# Altium PCB Car Power Supply v2 compact.PcbDoc
Units mm, origin at the board's own origin, x right, y up, seen from the top; angles counter-clockwise.
Board outline 152.4 x 101.6 mm, 2 copper layers (Top Layer, Bottom Layer); 27 components, 15 nets, 63 pads, 2 vias.
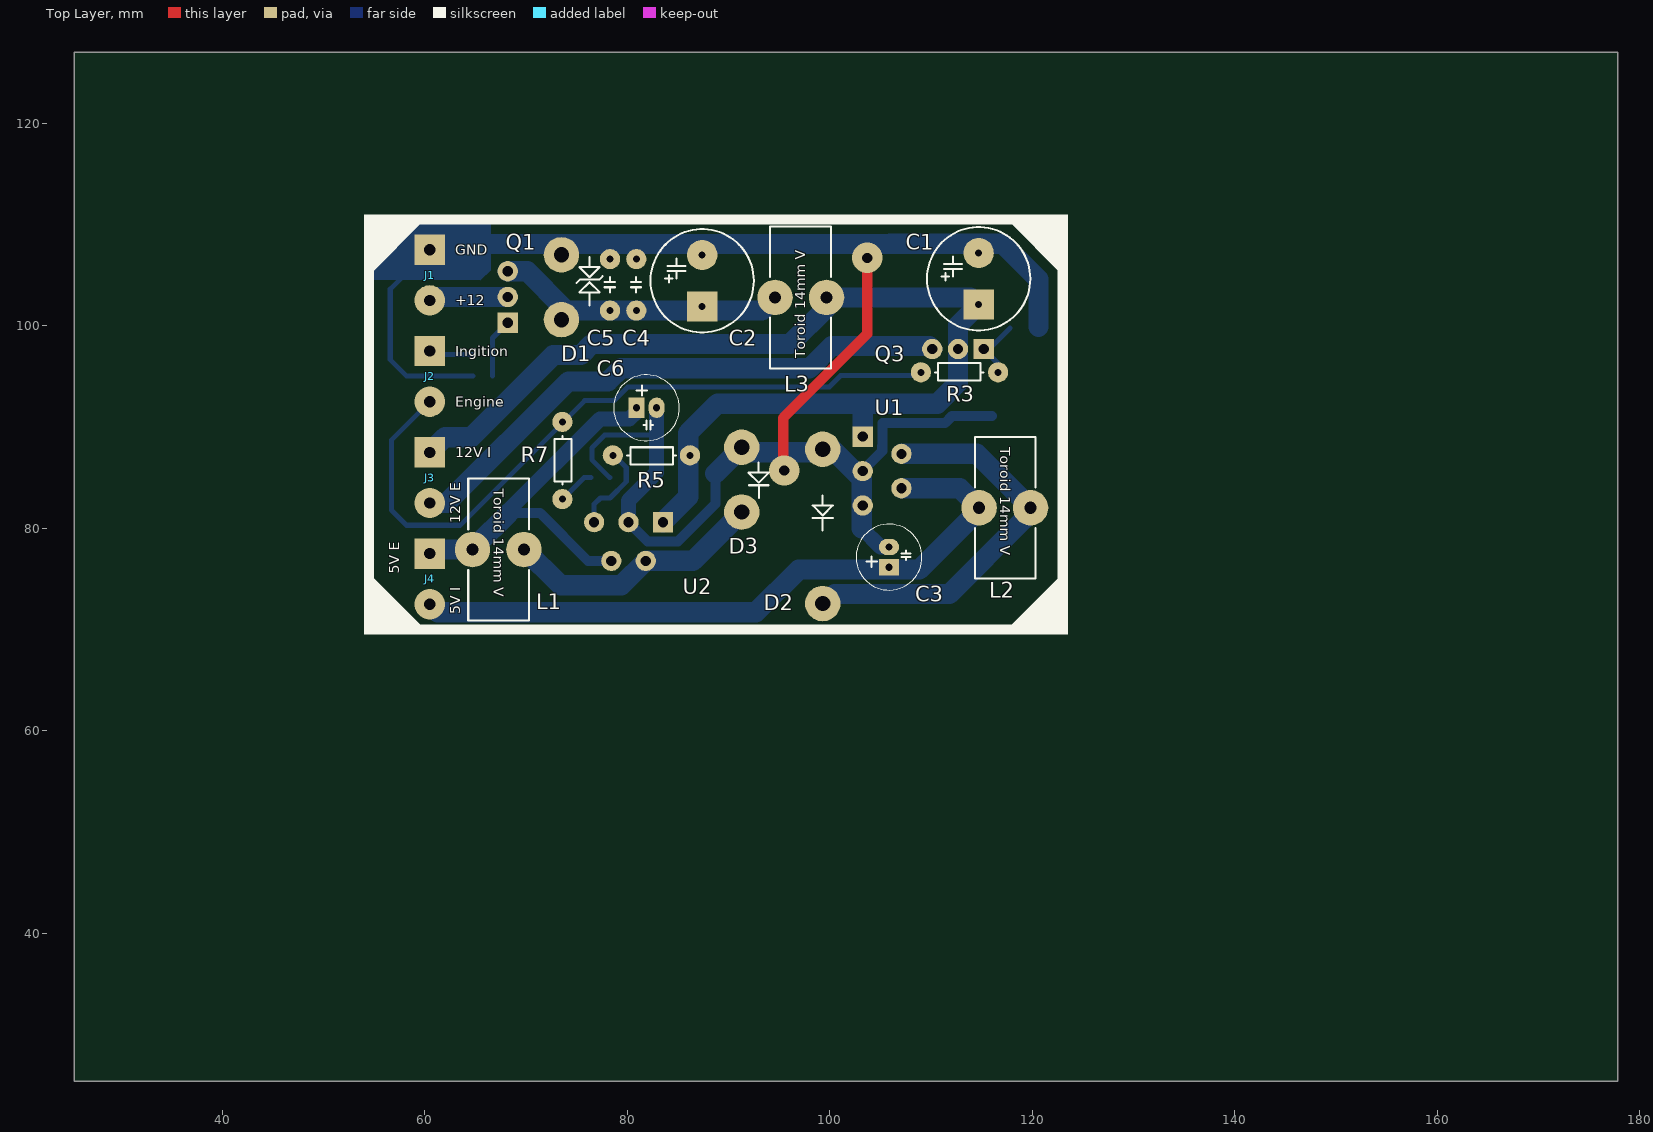
[diagram p0: Top Layer view]
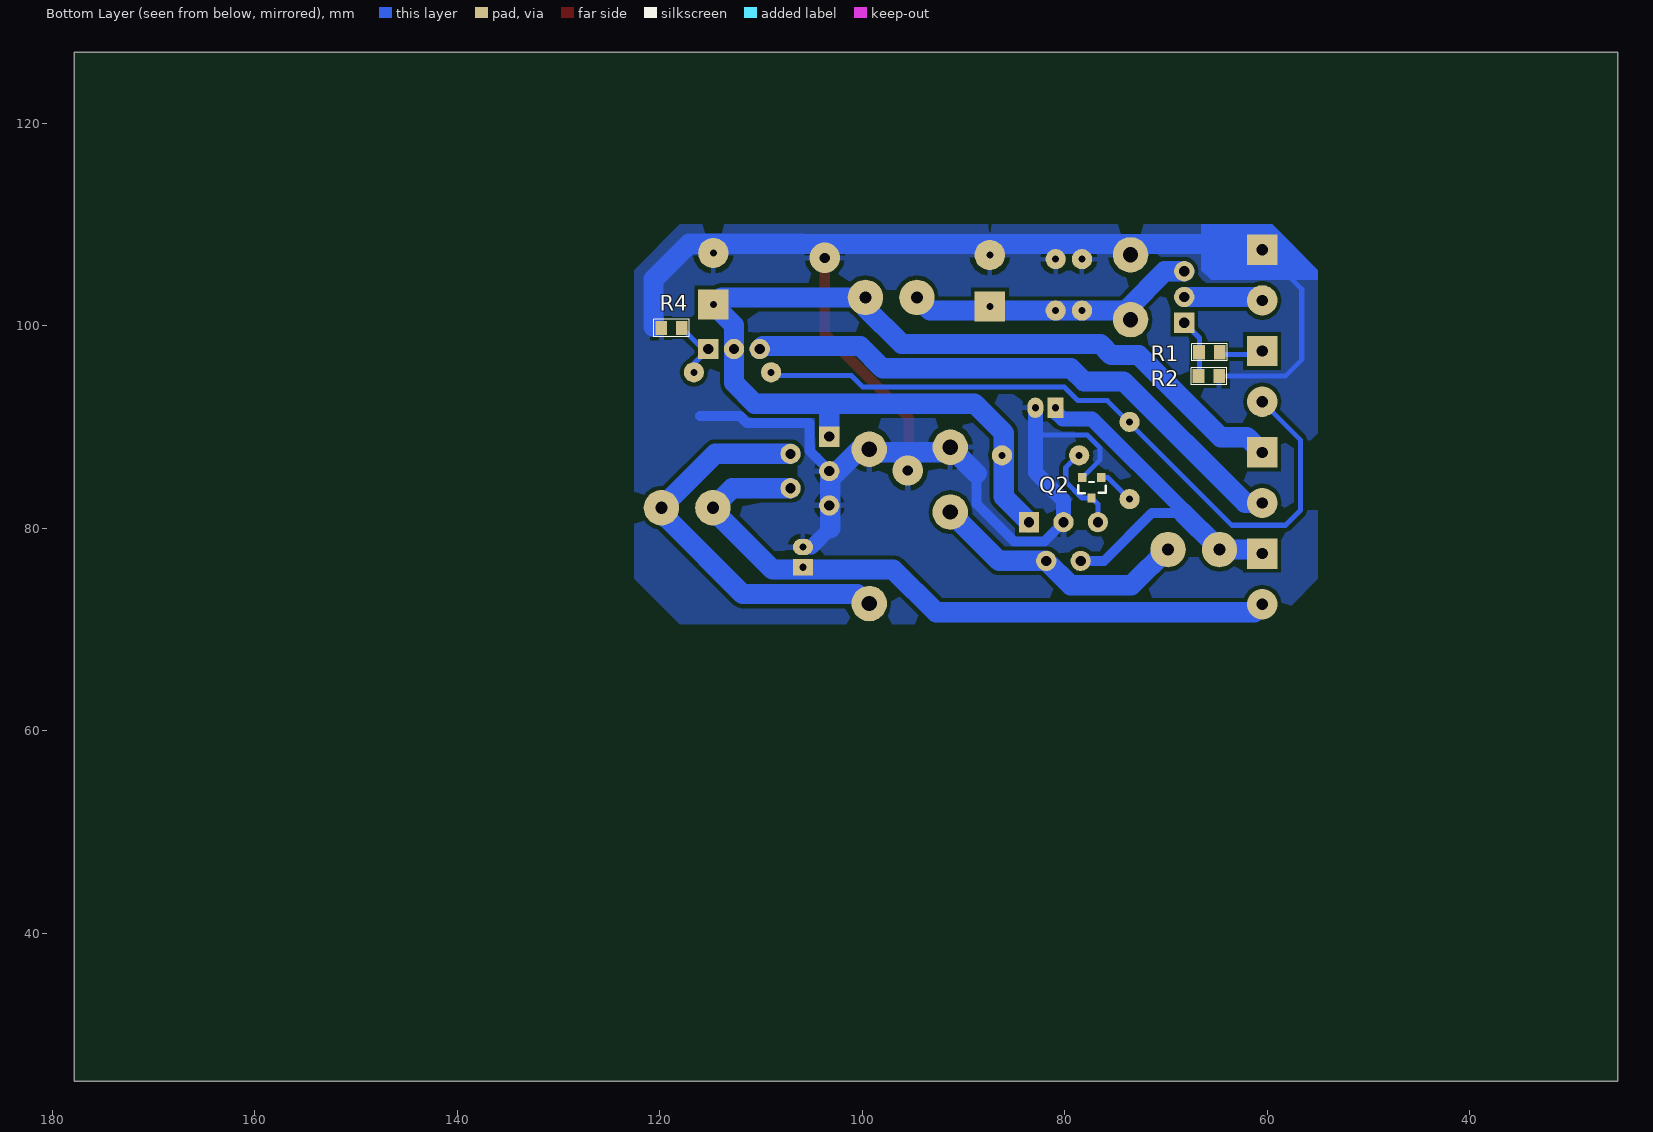
[diagram p1: Bottom Layer view, seen from below]
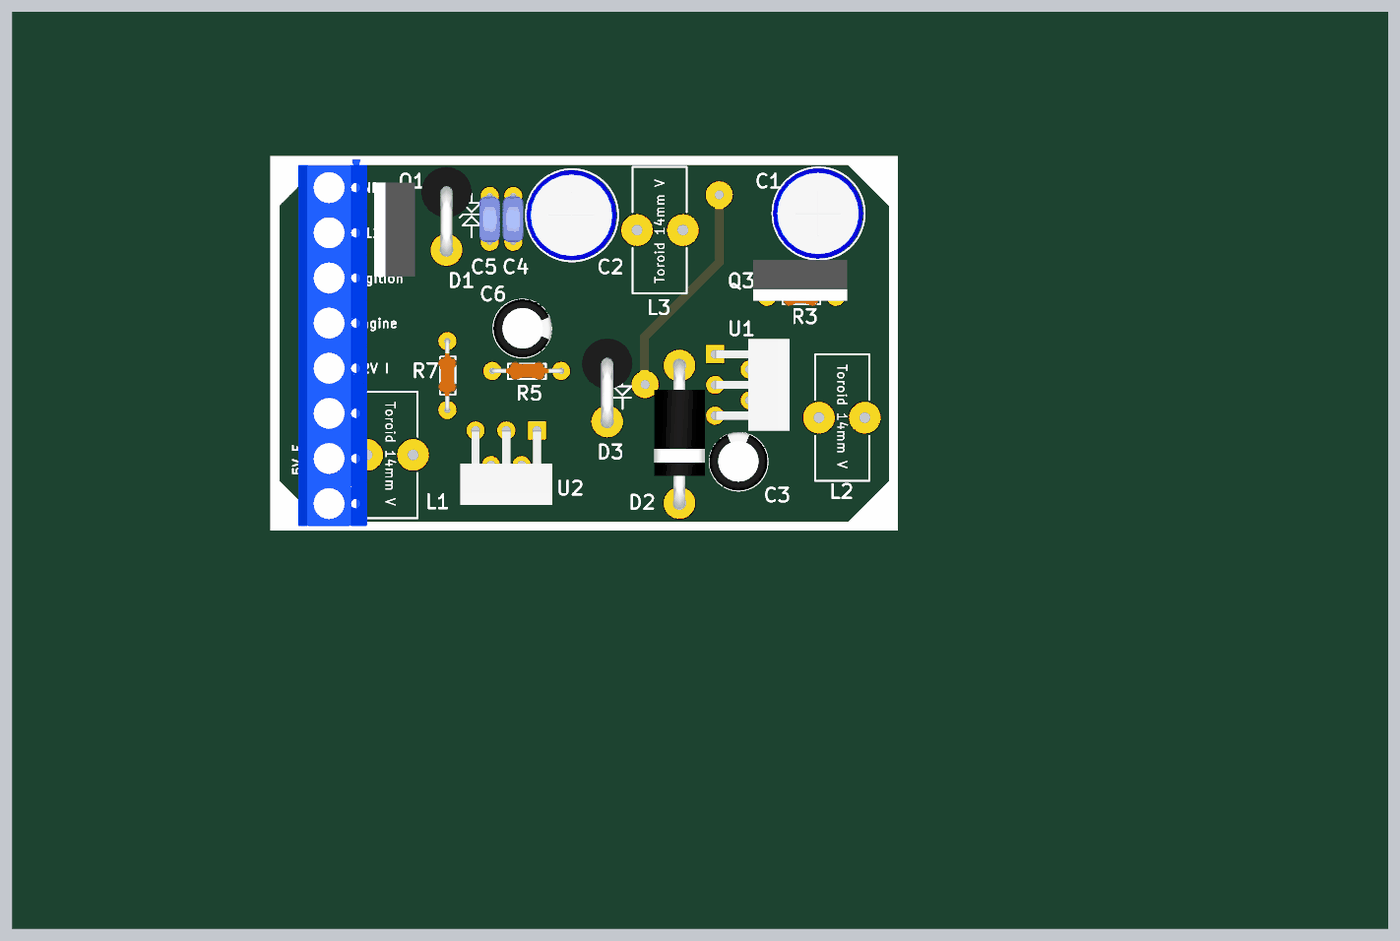
[diagram p2: 3D render of the assembled board from above, using the file's embedded part models]
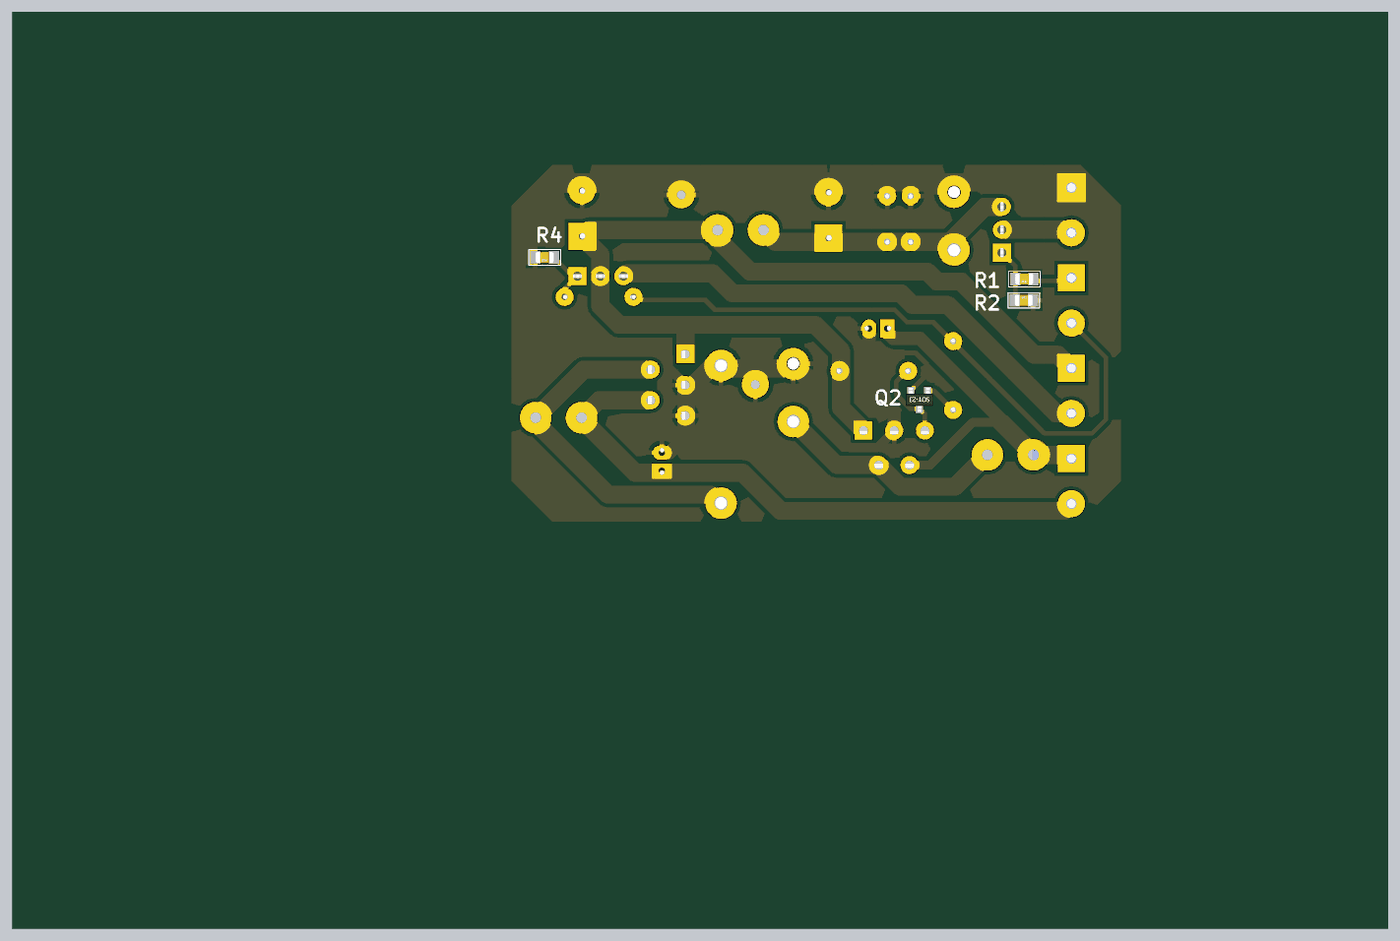
[diagram p3: 3D render of the assembled board from below, using the file's embedded part models]

## Layer stack, top to bottom
Top Solder: solder mask 0.0102, Solder Resist, Dk 3.5
Top Layer: signal copper 0.0356
Dielectric 1: dielectric 0.32, FR-4, Dk 4.8
Bottom Layer: signal copper 0.0356
Bottom Solder: solder mask 0.0102, Solder Resist, Dk 3.5

## Board outline
25.4,25.4 177.8,25.4 177.8,127 25.4,127

## Design rules (kind name [scope] priority, off if disabled: settings)
Clearance [All] p1: gap=0.4
ComponentClearance [All] p1: gap=0 collisioncheckmode=3 verticalgap=0 showdistances=FALSE
PlaneConnect [All] p1: planeconnectstyle=Relief reliefexpansion=0.508 reliefentries=4 reliefconductorwidth=0.4 reliefairgap=0.5
PolygonConnect [All] p1: connectstyle=Relief reliefconductorwidth=0.5 reliefentries=4 polygonreliefangle="90 Angle" airgapwidth=0.5
RoutingVias [All] p1: holewidth=0.711 width=1.27 viastyle="Through Hole" minholewidth=0.711 minwidth=1.27 maxholewidth=0.711 maxwidth=1.27
SolderMaskExpansion [All] p1: expansion=0.102
Width [All] p1: maxlimit=2 minlimit=0.2 preferedwidth=1
27 further rules are at their usual default settings.

## Components (designator, comment, footprint, x,y, rotation, side; value= is the part's Value field where it differs from the comment)
C1 "1000uF" "Cap E p5.08mm D10.2mm (3p)" 114.7,102.1 r90 top
C2 "1000uF" "Cap E p5.08mm D10.2mm (3p)" 87.4,101.9 r90 top
C3 "220uF 16V" "Cap E p2mm D6.5xH11" 105.85,76.15 r90 top
C4 "100n" "Cap P5.08MM (3p) disk2" 80.9,101.5 r90 top
C5 "10n" "Cap P5.08MM (3p) disk2" 78.3,101.5 r90 top
C6 "220uF 16V" "Cap E p2mm D6.5xH11" 80.9,91.9 r0 top
D1 "1.5KE20CA" "TVS diode DO-201 V" 73.5,107 r270 top
D2 "1N5822" "Diode DO-201" 99.3,87.8 r270 top
D3 "1N5822" "Diode DO-201 V" 91.3,88 r270 top
J1 "Connector" "DG301 5mm 2p" 60.5,107.5 r270 top
J2 "Connector" "DG301 5mm 2p" 60.5,97.5 r270 top
J3 "Connector" "DG301 5mm 2p" 60.5,87.5 r270 top
J4 "Connector" "DG301 5mm 2p" 60.5,77.5 r270 top
L1 "Inductor V" "Toroid V D14-W6" 69.8,77.9 r180 top
L2 "Inductor V" "Toroid V D14-W6" 119.825,82.025 r180 top
L3 "Inductor V" "Toroid V D14-W6" 94.6,102.8 r0 top
Q1 "TIP122" TO220-2 68.2,100.3 r0 top
Q2 "BC817-40" SOT-23 76.4,85 r0 bottom
Q3 "TIP122" TO220-2 115.2,97.7 r90 top
R1 "10k" "SMD 0805 (2012)" 66.8,95 r180 bottom
R2 "1kOm" "SMD 0805 (2012)" 64.7,97.4 r0 bottom
R3 "1 kOm" "Res p7.62 (4p) 0.25w" 109,95.4 r0 top
R4 "10 kOm" "SMD 0805 (2012)" 117.8,99.8 r0 bottom
R5 "10 kOm" "Res p7.62 (4p) 0.25w" 86.2,87.2 r180 top
R7 "1 kOm" "Res p7.62 (4p) 0.25w" 73.6,90.5 r270 top
U1 "LM2596T-5.0" "TO220-5 Vertical" 103.25,89.05 r180 top
U2 "LM2596T-5.0" "TO220-5 Vertical" 83.525,80.6 r90 top

## Footprints (in the part's own frame and the unit in brackets; to place one, negate y for a bottom-side part, rotate by r counter-clockwise, add the part's x,y. Pads: shape width x height; smd on the part's side, far side on the other; paste and mask are expansions set on the pad)
"Cap E p2mm D6.5xH11" [mm] "D 6.5mm; H 11mm"
  rect 1.6x2 hole 0.7: 1(0,0)
  oval 1.6x2 hole 0.7: 2(2,0)
  silkscreen extent -2.25,-3.25 4.25,3.25, body extent -2.22,-3.22 4.27,3.28, height 11.49
"Cap E p5.08mm D10.2mm (3p)" [mm] "D 10.2mm; H 17.5mm, Hole: 0.7mm"
  rect 3x3 hole 0.7: 1(0,0)
  round 3 hole 0.7: 2(5.08,0)
  silkscreen extent -2.56,-5.1 7.64,5.1, body extent -2.49,-4.97 7.57,5.08, height 16.53
"Cap P5.08MM (3p) disk2" [mm]
  round 2 hole 0.7: 1(0,0) 2(5.08,0)
  silkscreen extent 1.8,-0.48 3.3,0.53, body extent -0.29,-1.12 5.29,1.16, height 6.04
"DG301 5mm 2p" [mm]
  rect 3x3 hole 1.1: 1(0,0)
  round 3 hole 1.1: 2(5,0)
  body extent -3.1,-3.4 7.5,4.2, height 10
"Diode DO-201" [mm] "p6"
  round 3.5 hole 1.5: A(0,0) K(15.24,0)
  silkscreen extent 4.54,-1 8.04,1, body extent -0.66,-2.8 15.9,2.8, height 7.6
"Diode DO-201 V" [mm] "6p, p15.24mm"
  round 3.5 hole 1.5: A(0,0) K(6.4,0)
  silkscreen extent 1.5,0.67 5,2.67, body extent -2.8,-2.8 7.09,2.8, height 15.69
"Res p7.62 (4p) 0.25w" [mm] "L p7.62; horisontal"
  round 2 hole 0.7: 1(0,0) 2(7.62,0)
  silkscreen extent 1.4,-0.8 6.2,0.9, body extent -0.3,-1 7.8,1, height 2.1
"SMD 0805 (2012)" [mil]
  rect 45x55 smd: 1(0.35,0.98) 2(80.35,0.98)
  silkscreen extent -29,-32 109,34, body extent 1,-24 80,26, height 31
SOT-23 [mm]
  rect 0.8x0.9 smd: 1(0,0) 2(1.875,0) 3(0.95,2)
  silkscreen extent -0.45,0.45 2.27,1.53, body extent -0.57,-0.32 2.43,2.32, height 1.08
TO220-2 [mm]
  rect 2x2 hole 1: 1(0,0)
  round 2 hole 1: 2(0,2.54) 3(0,5.08)
  body extent -2.7,-2.65 1.8,7.75, height 19
"TO220-5 Vertical" [mm]
  rect 2x2 hole 1: 1(0,0)
  round 2 hole 1: 2(-3.825,1.7) 3(0,3.4) 4(-3.825,5.1) 5(0,6.8)
  body extent -8.24,-1.68 0,8.48, height 22.35
"Toroid V D14-W6" [mm] "10mm Black ring TEC.ORG"
  round 3.5 hole 1.2: 1(0,0) 2(5.08,0)
  silkscreen extent -0.5,-7 5.5,7
"TVS diode DO-201 V" [mm] "6p, p15.24mm"
  round 3.5 hole 1.5: 1(0,0) 2(6.4,0)
  silkscreen extent 0.2,1.47 5,4.07, body extent -2.8,-2.8 7.09,2.8, height 15.69

## Part data
C1 C2: library part "Cap E 1000mF x 25V", "Capacitor"
C3 C6: library part "Cap E 220mF x 16V", "Capacitor"
C4 C5: library part "Cap Ceramic", "Capacitor"
D1: library part "TVS 1.5KE20CA", "1500W Transil (TVS Diode)"
D2 D3: library part "D Shotki 1N5822", "3 Amp Shotki  Diode"
J1 J2 J3 J4: library part DG301-5.0-2P12, "DG301 series"
L1 L2 L3: "Inductor Vertical"
Q1 Q3: "NPN Darlington 5A, 65W, 100V, h>1000"
Q2: "NPN 45 V, 500 mA NPN general-purpose transistor"
R1 R2 R4: library part "Res SMD 0805"
R3 R5 R7: library part "Res All Types"
U1 U2: "Voltage Regulator"

## Via types
v1: diameter 3, hole 1, Top Layer to Bottom Layer, 2 vias

## Nets (pads, with @x,y where several pads share a name; then routed paths per layer and width w, separated by ;. In a path a pad name is that pad's centre, name@x,y a point inside that pad or via, vN(x,y) a via of type N, cw(c..) or ccw(c..) an arc to the next point about the centre after c; other vN are vias at no path point)
"+5V ENGINE": C6.1 J4.1 L1.2 U2.4 | length 38.7
  Bottom Layer w1: 68.3,81.5 71.4,81.5 76.125,76.775 U2.4
  Bottom Layer w1.5: 68.3,81.5 68.3,81.8 77.3,90.8 80.2,90.8 C6.1@80.9,91.5
  Bottom Layer w2: J4.1 60.9,77.9 L1.2 ; L1.2@65.06,77.56 65.06,78.26 68.3,81.5
"+5V INGITION": C3.1 J4.2 L2.2 U1.4 | length 66.9
  Bottom Layer w2: J4.2 61.3,71.7 92.7,71.7 96.925,75.925 108.825,75.925 L2.2@114.5,81.6 ; U1.4 112.82,83.95 L2.2
"+12 V RAW": C2.1 C4.1 C5.1 D1.2 L3.1 Q1.3 | length 27.9
  Bottom Layer w2: Q1.3 70.12,105.38 D1.2@73.8,101.7 ; D1.2@74.4,101.5 93.3,101.5 L3.1
+12V: J1.2 Q1.2 | length 7.8
  Bottom Layer w2: J1.2 60.84,102.84 Q1.2
"+12V ENGINE": J3.2 Q3.3 | length 56.2
  Bottom Layer w2: J3.2 62.2,82.5 74.2,94.5 78.1,94.5 79.4,95.8 98,95.8 100.2,98 109.82,98 Q3.3
"+12V NO NOISE": C1.1 J3.1 L3.2 Q3.2 R5.1 U1.1 U2.1 | length 111.3
  Bottom Layer w2: J3.1 62,89 64.6,89 72.7,97.1 75.4,97.1 76.5,98.2 96.1,98.2 99.68,101.78 L3.2 113.9,102.8 C1.1@114.65,102.05 ; U2.1 86.02,83.095 86.02,89.42 88.9,92.3 110.6,92.3 112.66,94.36 112.66,100.06 C1.1 ; U1.1 103.25,91.85
GND: C1.2 C2.2 C3.2 C4.2 C5.2 C6.2 D1.1 D2.A D3.A J1.1 Q2.2 R1.2 R4.2 U1.3 U1.5 U2.3 | length 191.6
  Top Layer w1: v1(95.5,85.7) 94.9,85.7 95.4,86.2 95.4,90.9 103.7,99.2 v1(103.7,106.7)
  Bottom Layer w0.5: J1.1 56.6,103.6 56.6,96.65 58.225,95.025 R1.2 ; Q2.2 76.5,86.775 76.5,87.933 77.767,89.2 82.8,89.2 82.9,89.3
  Bottom Layer w1: U2.3 82.025,78.7 83.7,78.7 85,78.7 88.7,82.4 88.7,85.4 ; U1.3@102.788,85.238 105.175,87.625 105.175,88.137 105.2,88.162 105.2,90.4 111.387,90.4 112.087,91.1 116,91.1
  Bottom Layer w1.5: U2.3 80.125,82.725 82.9,85.5 82.9,89.3 C6.2@82.9,91.5 ; 103.15,80 105,78.15 C3.2
  Bottom Layer w2: J1.1 61.08,108.08 105.9,108.08 ; 88.7,85.4 D3.A ; D3.A@91.4,87.9 91.8,87.5 98.4,87.5 D2.A@98.8,87.9 ; D2.A 100.225,87.8 103.15,84.875 103.15,80 ; 105.98,108.1 117.1,108.1 120.6,104.6 120.6,99.9
NetD2_K: D2.K L2.1 U1.2 | length 37.5
  Bottom Layer w2: D2.K@99.9,72.9 100.5,73.5 111.8,73.5 L2.1@119.175,80.875 ; U1.2 114.5,87.35 L2.1
NetD3_K: D3.K L1.1 U2.2 | length 26.1
  Bottom Layer w2: L1.1@69.75,78.05 73.425,74.375 79.425,74.375 81.85,76.8 86.5,76.8 D3.K
NetQ1_1: Q1.1 R1.1 R2.2 | length 5.9
  Bottom Layer w0.5: R1.1@66.7,95.025 66.7,98.8 Q1.1
NetQ2_1: Q2.1 R7.2 | length 3.7
  Bottom Layer w0.5: R7.2 75.72,85 Q2.1
NetQ2_3: Q2.3 R5.2 U2.5 | length 9.4
  Bottom Layer w0.5: U2.5 76.725,82.375 Q2.3 78.3,83 79.9,84.6 79.9,86 R5.2@78.4,87.5
NetQ3_1: Q3.1 R3.2 R4.1 | length 6.7
  Bottom Layer w0.5: R3.2@116.62,95.1 116.62,96.28 Q3.1 115.734,97.7 R4.1
"ON ENGINE": J2.2 R3.1 R7.1 | length 71.3
  Bottom Layer w0.5: J2.2 56.7,88.7 56.7,81.8 58.2,80.3 63.5,80.3 75.8,92.6 78.7,92.6 80.05,93.95 99.95,93.95 101.075,95.075 R3.1@109,95.075
"ON INGITION": J2.1 R2.1 | length 4.4
  Bottom Layer w0.5: J2.1 60.825,97.175 R2.1@64.809,97.175

## Polygon pours and split planes (outlines as drawn)
GND on Bottom Layer "Top Layer-No Net" (solid, pour order 2): 55,105.5 59.5,110 118,110 122.5,105.5 122.5,75 118,70.5 59.5,70.5 55,75

## Other copper
Bottom Layer:
  region net GND: 55,105.5 59.5,110 66.5,110 66.5,105.5 65.5,104.5 65.478,104.522 55,104.522

## Silkscreen, mask and mechanical layers (free items; w line width, h text height)
Top Overlay:
  rectangle: 54,110 123.5,111
  rectangle: 54,70.5 55,110
  rectangle: 54,69.5 123.5,70.5
  rectangle: 122.5,70.5 123.5,110
  region: 59.5,110 55,105.5 55,110
  region: 55,75 59.5,70.5 55,70.5
  region: 118,70.5 122.5,75 122.5,70.5
  region: 122.5,105.5 118,110 122.5,110
  text "GND" at 63,107 h1
  text "+12" at 63,102 h1
  text "Ingition" at 63,97 h1
  text "Engine" at 63,92 h1
  text "12V I" at 63,87 h1
  text "12V E" at 63.5,80.5 h1 r90
  text "5V E" at 57.5,75.5 h1 r90
  text "5V I" at 63.5,71.5 h1 r90

## Text inside footprints (layer, text, board x,y; h text height)
L1: Top Overlay "Toroid 14mm V" at 66.8,83.9 h1 r270
L2: Top Overlay "Toroid 14mm V" at 116.825,88.025 h1 r270
L3: Top Overlay "Toroid 14mm V" at 97.6,96.8 h1 r90